# EAGLE board hodiny (EAGLE 7.6.0)
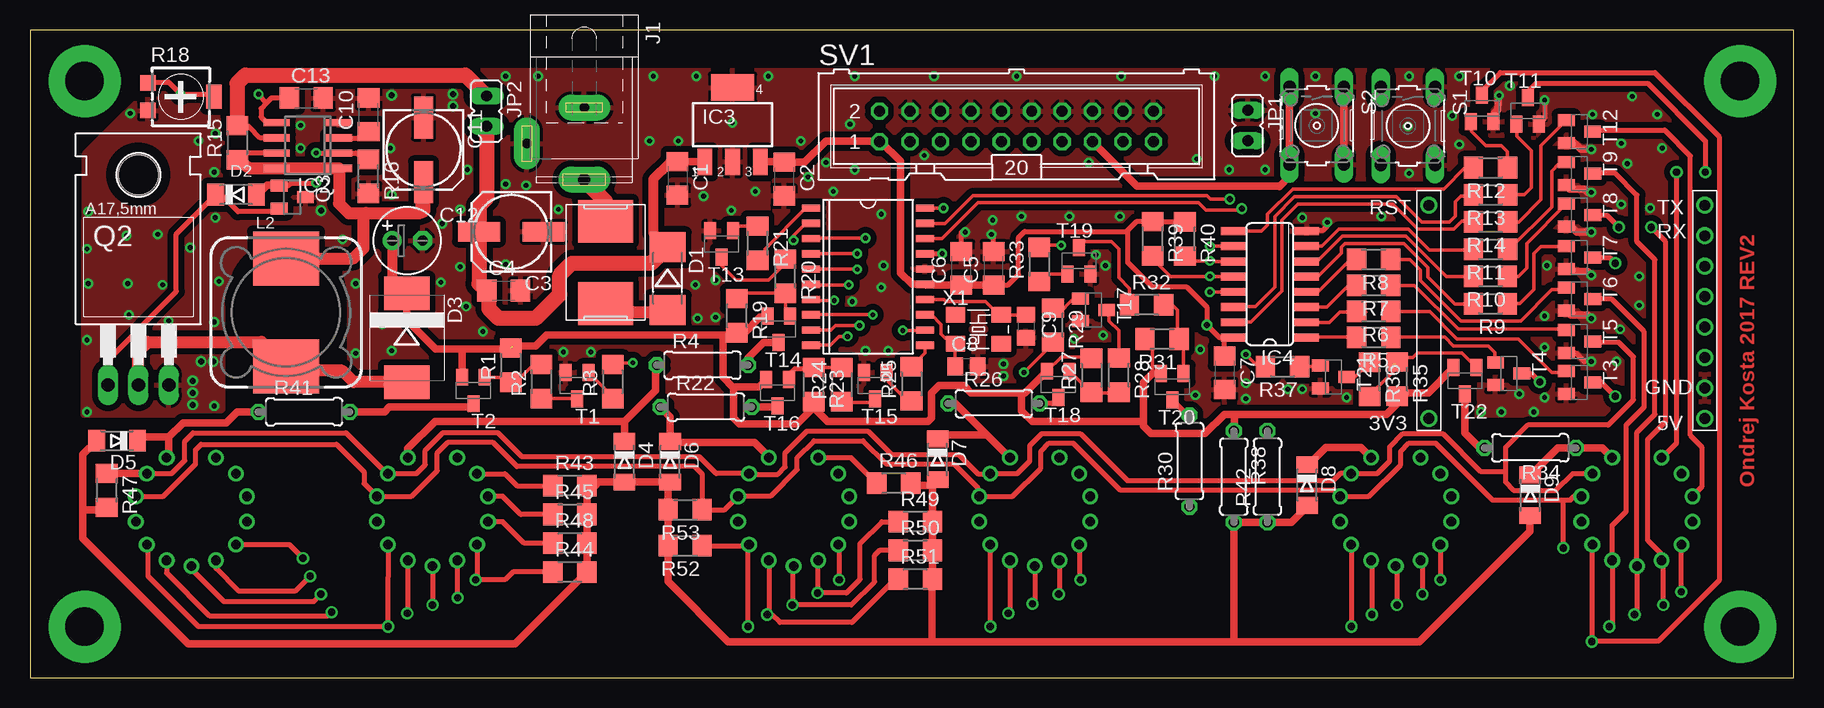
[diagram p0: board, top side]
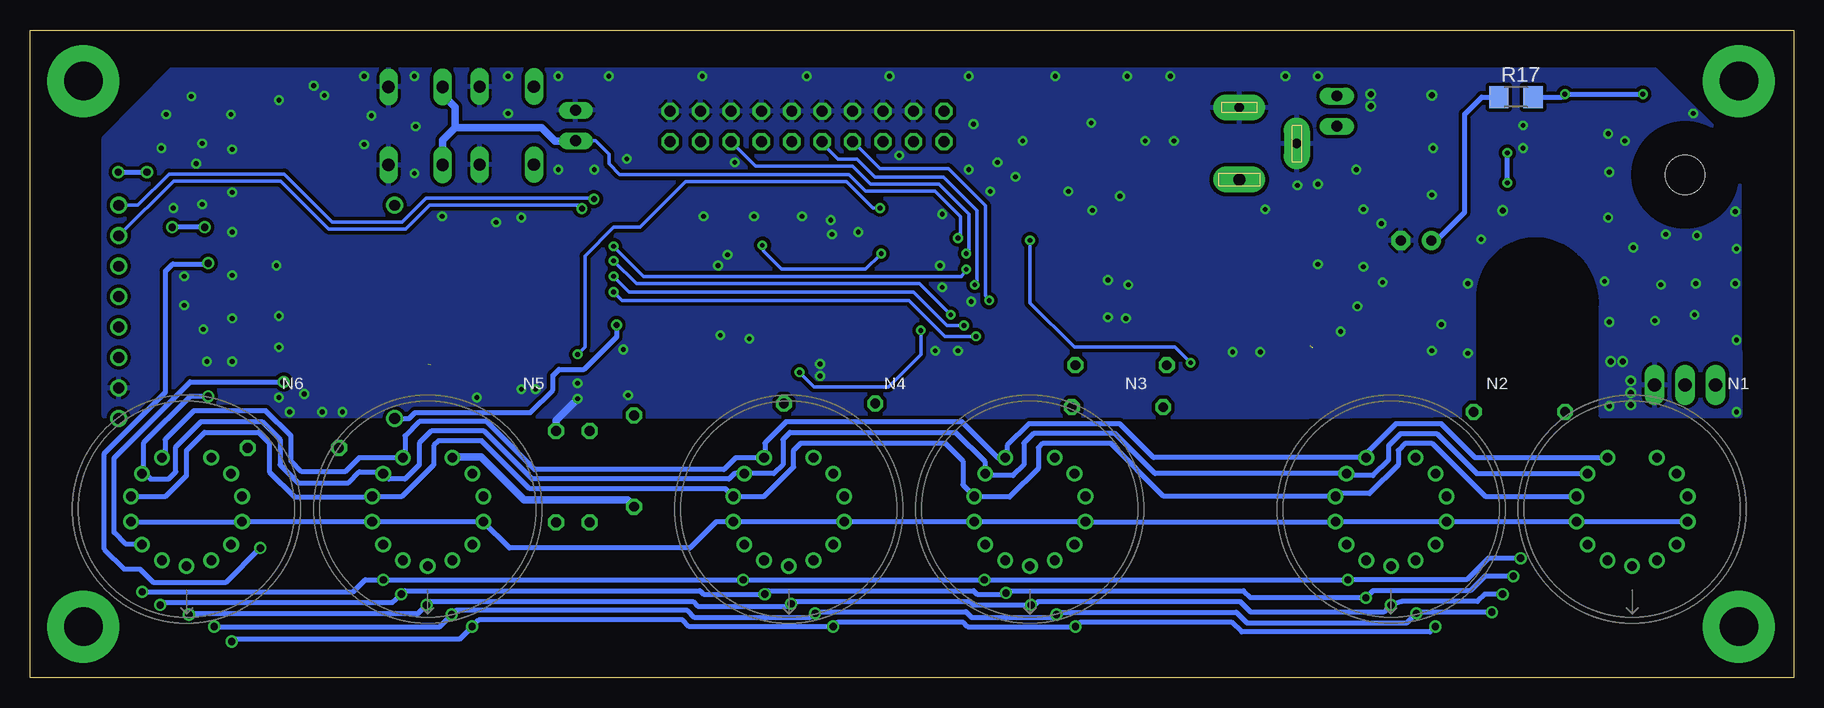
[diagram p1: board, bottom side, seen from below]

Size 147 x 54 mm. Coordinates in mm from the lower left corner, seen from the top.
Outline: 0,0 147,0 147,54 0,54 0,0
Copper layers (1*16): Top 0.035mm / dielectric 1.5mm / Bottom 0.035mm
Design rules "default *": minimum track width 0.2mm, minimum drill 0.4mm, track to track 0.25mm, track to pad 0.25mm, pad to pad 0.25mm, via to via 0.25mm, smd to smd 8mil, copper to edge 40mil, drill to drill 8mil, minimum pad ring 10mil, minimum via ring 8mil, stop-mask expansion 4mil, vias tented up to drill 0mil, thermal gap 10mil

## Footprints (pad centres in the part's own frame; a part is rotated, then mirrored left to right if it is on the bottom)
C1206 = smd 1.6 x 1.8: 1 -1.4,0; 2 1.4,0
153CLV-0605 = smd 3.5 x 1.6: + 2.7,0; - -2.7,0
C0805 = smd 1.3 x 1.5: 1 -0.95,0; 2 0.95,0
E2,5-6 = drill 0.813 pad 1.6: + -1.27,0 | drill 0.813 pad 1.6 octagon: - 1.27,0
MELF-MLL41 = smd 2.5 x 3: A 2.625,0; C -2.625,0
SOD80C = smd 1.4 x 1.8: 1 -1.7,0; 2 1.7,0
SMC = smd 2.8 x 3.8: A 3.7,0; C -3.7,0
MINIMELF = smd 1.4 x 1.8: A 1.7,0; C -1.7,0
3425L = smd 3.556 x 4.57: P$1 -3.43,0; P$2 3.438,0
SOIC8 = smd 0.6 x 2.2: 1 -1.905,-2.6; 2 -0.635,-2.6; 3 0.635,-2.6; 4 1.905,-2.6; 5 1.905,2.6; 6 0.635,2.6; 7 -0.635,2.6; 8 -1.905,2.6
SOT223 = smd 1.219 x 2.235: 1 -2.311,-3.099; 2 0,-3.099; 3 2.311,-3.099 | smd 3.6 x 2.2: 4 0,3.099
SO16 = smd 0.66 x 2.032: 1 -4.445,-3.073; 2 -3.175,-3.073; 3 -1.905,-3.073; 4 -0.635,-3.073; 5 0.635,-3.073; 6 1.905,-3.073; 7 3.175,-3.073; 8 4.445,-3.073; 9 4.445,3.073; 10 3.175,3.073; 11 1.905,3.073; 12 0.635,3.073; 13 -0.635,3.073; 14 -1.905,3.073; 15 -3.175,3.073; 16 -4.445,3.073
SPC4077 = drill 0.8 pad 2.184 long: 1 -3,0; 2 0,-4.8 | drill 1 pad 2.184 long: 3 3,0
JP1 = drill 0.914 long: 1 0,-1.27; 2 0,1.27
MSS1278 = smd 5.5 x 4.5: 1 0,4.5; 2 0,-4.5
Z570M = drill 0.8: 1 2.061,-4.28; 2 3.714,-2.962; 3 4.631,-1.057; 4 4.631,1.057; 5 3.714,2.962; 6 2.061,4.28; 7 0,4.75; 8 -2.061,4.28; 9 -3.714,2.962; 10 -4.631,1.057; 11 -4.631,-1.057; 12 -3.714,-2.962; 13 -2.061,-4.28
TO220BH = drill 1.118 long: D 0,-6.35; G -2.54,-6.35; S 2.54,-6.35 | hole 3.302: 0,11.176
SOT23 = smd 1 x 1.4: 1 -0.95,-1.1; 2 0.95,-1.1; 3 0,1.1
R1206 = smd 1.6 x 1.803: 1 -1.422,0; 2 1.422,0
0207/7 = drill 0.813 octagon: 1 -3.81,0; 2 3.81,0
RTRIM4G/J = smd 1.3 x 1.3: 1 -1.15,-2.75; 3 1.15,-2.75 | smd 2 x 1.3: 2 0,2.75
B3F-10XX = drill 1.016 long: 1 -3.251,2.261; 2 3.251,2.261; 3 -3.251,-2.261; 4 3.251,-2.261
ML20 = drill 0.914 octagon: 1 -11.43,-1.27; 2 -11.43,1.27; 3 -8.89,-1.27; 4 -8.89,1.27; 5 -6.35,-1.27; 6 -6.35,1.27; 7 -3.81,-1.27; 8 -3.81,1.27; 9 -1.27,-1.27; 10 -1.27,1.27; 11 1.27,-1.27; 12 1.27,1.27; 13 3.81,-1.27; 14 3.81,1.27; 15 6.35,-1.27; 16 6.35,1.27; 17 8.89,-1.27; 18 8.89,1.27; 19 11.43,-1.27; 20 11.43,1.27
SOT23-BEC = smd 1 x 1.4: B -0.95,-1.1; C 0,1.1; E 0.95,-1.1
SOT163-1 = smd 0.6 x 1.5: 1 -5.715,-4.75; 2 -4.445,-4.75; 3 -3.175,-4.75; 4 -1.905,-4.75; 5 -0.635,-4.75; 6 0.635,-4.75; 7 1.905,-4.75; 8 3.175,-4.75; 9 4.445,-4.75; 10 5.715,-4.75; 11 5.715,4.75; 12 4.445,4.75; 13 3.175,4.75; 14 1.905,4.75; 15 0.635,4.75; 16 -0.635,4.75; 17 -1.905,4.75; 18 -3.175,4.75; 19 -4.445,4.75; 20 -5.715,4.75
ESP8266-LIM = drill 0.9: 3V3 0,0; 5V 23,0; GND 23,2.54; P$8 23,5.08; P$9 23,7.62; P$10 23,10.16; P$11 23,12.7; RST 0,17.78; RX 23,15.24; TX 23,17.78
IQG5032B = smd 1.6 x 1.3: 1 -1.9,-1.2; 2 1.9,-1.2; 3 1.9,1.2; 4 -1.9,1.2

## Placement (x,y rotation side)
C1  330n  [C1206]  53.97,41.62 270 top
C2  100n  [C1206]  62.87,41.57 270 top
C3  100uF/25V  [153CLV-0605]  40.13,37.17 180 top
C4  100n  [C1206]  39.48,32.27 0 top
C5  100n  [C1206]  80.33,34.13 90 top
C6  10n  [C1206]  77.63,34.12 90 top
C7  100n  [C1206]  99.57,25.42 270 top
C8  39p  [C0805]  78.06,25.93 0 top
C9  39p  [C0805]  83.02,29.29 270 top
C10  2200p  [C1206]  28.23,46.93 90 top
C11  220uF/25V  [153CLV-0605]  32.8,44 270 top
C12  2.2uF/250V  [E2,5-6]  31.45,36.43 0 top
C13  10n  [C1206]  23.03,48.32 0 top
D1  1N4007  [MELF-MLL41]  53.15,33.27 270 top
D2  PMLL4148L  [SOD80C]  17.17,40.27 0 top
D3  ES3F  [SMC]  31.4,28.33 270 top
D4  BAV103  [MINIMELF]  49.55,18 270 top
D5  BAV103  [MINIMELF]  7.25,19.75 180 top
D6  BAV103  [MINIMELF]  53.35,18 270 top
D7  BAV103  [MINIMELF]  75.65,18.2 270 top
D8  BAV103  [MINIMELF]  106.45,16.05 270 top
D9  BAV103  [MINIMELF]  125.05,15.2 270 top
F1  3425L  [3425L]  47.97,34.62 270 top
IC2  MC34063AD  [SOIC8]  23.16,44.36 90 top
IC3  UA78M33DCY  [SOT223]  58.56,46.1 0 top
IC4  4028D  [SO16]  103.35,32.8 90 top
J1  12V  [SPC4077]  46.2,44.53 270 top
JP1  [JP1]  101.51,46.03 180 top
JP2  [JP1]  38.06,47.23 180 top
L2  MSS1278-220uF  [MSS1278]  21.35,30.45 0 top
N1  Z573M  [Z570M]  13.45,14.05 180 bottom
N2  Z573M  [Z570M]  33.55,14.05 180 bottom
N3  Z573M  [Z570M]  63.65,14.05 180 bottom
N4  Z573M  [Z570M]  83.75,14.05 180 bottom
N5  Z573M  [Z570M]  113.85,14.05 180 bottom
N6  Z573M  [Z570M]  133.95,14.05 180 bottom
Q2  IRF740H  [TO220BH]  9.04,30.74 0 top
Q3  MMBTA56-SOT23  [SOT23]  21.86,40.06 270 top
R1  10K  [R1206]  40.08,26.05 90 top
R2  470K  [R1206]  42.63,24.68 90 top
R3  56K  [R1206]  48.58,24.67 90 top
R4  12K  [0207/7]  56.05,26.05 0 top
R5  7K5  [R1206]  112.01,28.38 180 top
R6  7K5  [R1206]  112.01,30.53 180 top
R7  7K5  [R1206]  112,32.7 180 top
R8  7K5  [R1206]  112,34.86 180 top
R9  7K5  [R1206]  121.73,31.18 180 top
R10  7K5  [R1206]  121.73,33.45 180 top
R11  7K5  [R1206]  121.74,35.72 180 top
R12  7K5  [R1206]  121.74,42.52 180 top
R13  7K5  [R1206]  121.74,40.26 180 top
R14  7K5  [R1206]  121.74,37.99 180 top
R15  1R  [R1206]  17.28,44.59 90 top
R16  1K  [R1206]  28.22,41.79 270 top
R17  1M5  [R1206]  23.13,48.4 0 bottom
R18  20K  [RTRIM4G/J]  12.57,48.44 270 top
R19  10K  [R1206]  58.92,30.17 270 top
R20  470K  [R1206]  62.97,33.47 270 top
R21  56K  [R1206]  60.65,36.22 270 top
R22  12K  [0207/7]  56.35,22.55 0 top
R23  10K  [R1206]  65.32,24.43 270 top
R24  470K  [R1206]  67.67,24.42 90 top
R25  56K  [R1206]  73.48,24.49 90 top
R26  12K  [0207/7]  80.35,22.85 0 top
R27  10K  [R1206]  88.48,25.21 90 top
R28  470K  [R1206]  90.77,25.22 270 top
R29  56K  [R1206]  85.27,29.39 270 top
R30  12K  [0207/7]  96.65,18.05 90 top
R31  10K  [R1206]  94.37,28.23 180 top
R32  470K  [R1206]  93.08,31.07 0 top
R33  56K  [R1206]  84.13,34.45 90 top
R34  12K  [0207/7]  125.05,19.15 180 top
R35  10K  [R1206]  113.97,24.88 270 top
R36  470K  [R1206]  111.67,24.87 270 top
R37  56K  [R1206]  104.41,25.93 180 top
R38  47K  [0207/7]  100.35,16.75 270 top
R39  10K  [R1206]  93.57,36.59 270 top
R40  10K  [R1206]  96.27,36.57 270 top
R41  12K  [0207/7]  22.85,22.15 0 top
R42  47K  [0207/7]  103.15,16.75 90 top
R43  220K  [R1206]  45,16 0 top
R44  220K  [R1206]  45,8.8 0 top
R45  220K  [R1206]  45,13.6 0 top
R46  220K  [R1206]  72,16.2 0 top
R47  220K  [R1206]  6.4,15.6 270 top
R48  220K  [R1206]  45,11.2 0 top
R49  220K  [R1206]  73.8,13 0 top
R50  220K  [R1206]  73.8,10.6 0 top
R51  220K  [R1206]  73.8,8.2 0 top
R52  220K  [R1206]  54.6,11 180 top
R53  220K  [R1206]  54.6,14 180 top
S1  [B3F-10XX]  114.86,46 270 top
S2  [B3F-10XX]  107.26,46.03 270 top
SV1  [ML20]  82.23,45.97 0 top
T1  BTA42  [SOT23-BEC]  45.61,24.34 180 top
T2  BTA92  [SOT23-BEC]  36.96,23.94 180 top
T3  BTA42  [SOT23-BEC]  129.16,24.61 270 top
T4  BTA42  [SOT23-BEC]  123.26,25.34 270 top
T5  BTA42  [SOT23-BEC]  129.16,28.01 270 top
T6  BTA42  [SOT23-BEC]  129.16,31.56 270 top
T7  BTA42  [SOT23-BEC]  129.16,35.01 270 top
T8  BTA42  [SOT23-BEC]  129.16,38.56 270 top
T9  BTA42  [SOT23-BEC]  129.16,42.01 270 top
T10  BTA42  [SOT23-BEC]  121.04,47.46 0 top
T11  BTA42  [SOT23-BEC]  124.84,47.25 0 top
T12  BTA42  [SOT23-BEC]  129.15,45.51 270 top
T13  BTA42  [SOT23-BEC]  57.65,36.16 180 top
T14  BTA92  [SOT23-BEC]  62.41,29.05 180 top
T15  BTA42  [SOT23-BEC]  70.45,24.34 180 top
T16  BTA92  [SOT23-BEC]  62.31,23.75 180 top
T17  BTA42  [SOT23-BEC]  88.65,30.66 270 top
T18  BTA92  [SOT23-BEC]  85.71,24.45 180 top
T19  BTA42  [SOT23-BEC]  87.44,34.75 0 top
T20  BTA92  [SOT23-BEC]  95.21,24.25 180 top
T21  BTA42  [SOT23-BEC]  108.65,25.06 270 top
T22  BTA92  [SOT23-BEC]  119.61,24.75 180 top
U1  LPC812M101JD20  [SOT163-1]  69.87,33.43 270 top
U$1  ESP8266-LIM  [ESP8266-LIM]  116.6,21.6 0 top
X1  SMCE-5032  [IQG5032B]  79.05,29.05 0 top

## Library data of the parts
C1-C13 R1-R53 = rcl
D1 D3-D9 = diode
D2 = NXP_60_26022015; FARNELL: 1097176
F1 = ptc-littlefuse
IC2 = mc34063
IC3 = linear
IC4 = 40xx
J1 = con-jack; OC_FARNELL: unknown; OC_NEWARK: unknown
JP1 JP2 = jumper
L2 = inductor-coilcraft-3
N1-N6 = nixietubes-western
Q2 = transistor-power
Q3 = transistor-pnp
S1 S2 = switch-omron; MPN: B3F-1000; OC_FARNELL: 176432; OC_NEWARK: 36M3542
SV1 = con-harting-ml; OC_FARNELL: unknown; OC_NEWARK: unknown
T1-T22 = transistor
U1 = NXP_60_26022015; COMP: 1; FLASH: 16k; GPIO: 18; I2C: 1; SPI: 1; SRAM: 4k; USART: 2
U$1 = esp8266-lim
X1 = interquip

## Nets
100V: D4.A D5.A D6.A D7.A D8.A D9.A R38.2 R42.1 R43.2 R44.2 R45.2 R46.2 R47.2 R48.2 R49.2 R50.2 R51.2 R52.2 R53.2
180V: C12.+ D3.C R1.2 R17.1 R19.2 R23.2 R27.2 R31.2 R35.2 R38.1 T2.E T14.E T16.E T18.E T20.E T22.E
+3V3: C2.1 C5.1 C6.1 C7.1 IC3.3 IC4.16 R39.1 R40.1 SV1.1 U1.15 U$1.3V3
+12V: C1.1 C3.+ C4.1 D1.C IC3.1 JP2.2
BCD_A: IC4.10 U1.5
BCD_B: IC4.13 U1.10
BCD_C: IC4.12 R39.2 U1.9
BCD_D: IC4.11 R40.2 U1.8
GND: C1.2 C2.2 C3.- C4.2 C5.2 C6.2 C7.2 C8.2 C9.2 C10.2 C11.- C12.- C13.2 IC2.4 IC3.2 IC3.4 IC4.8 J1.1 J1.2 JP1.1 Q2.S Q3.3 R16.2 R18.3 R42.2 S1.1 S1.2 S2.1 S2.2 SV1.4 SV1.6 SV1.8 SV1.10 SV1.12 SV1.14 SV1.16 SV1.18 SV1.20 T1.E T3.E T4.E T5.E T6.E T7.E T8.E T9.E T10.E T11.E T12.E T13.E T15.E T17.E T19.E T21.E U1.16 U$1.GND
H1: R3.2 U1.2
H2: R21.2 U1.1
K0: N1.12 N2.12 N3.12 N4.12 N5.12 N6.12 R47.1 T5.C
K1: N1.1 N2.1 N3.1 N4.1 N5.1 N6.1 R46.1 T11.C
K2: N1.2 N2.2 N3.2 N4.2 N5.2 N6.2 R43.1 T3.C
K3: N1.3 N2.3 N3.3 N4.3 N5.3 N6.3 R45.1 T12.C
K4: N1.5 N2.5 N3.5 N4.5 N5.5 N6.5 R44.1 T4.C
K5: N1.6 N2.6 N3.6 N4.6 N5.6 N6.6 R49.1 T8.C
K6: N1.7 N2.7 N3.7 N4.7 N5.7 N6.7 R50.1 T9.C
K7: N1.8 N2.8 N3.8 N4.8 N5.8 N6.8 R51.1 T6.C
K8: N1.9 N2.9 N3.9 N4.9 N5.9 N6.9 R52.1 T10.C
K9: N1.11 N2.11 N3.11 N4.11 N5.11 N6.11 R53.1 T7.C
K10: N1.4 N1.10 N2.4 N2.10 N3.4 N3.10 N4.4 N4.10 N5.4 N5.10 N6.4 N6.10 R48.1
M1: R25.2 U1.11
M2: R29.2 U1.12
N$1: F1.P$1 J1.3
N$2: D1.A F1.P$2
N$3: S2.3 S2.4 SV1.15 U1.4
N$4: JP1.2 S1.3 S1.4 U1.3
N$5: SV1.9 U1.6
N$6: SV1.7 U1.7
N$7: C9.1 U1.14 X1.3
N$8: C8.1 U1.13 X1.1
N$10: U1.18 U$1.RX
N$12: R3.1 T1.B
N$13: R2.1 T1.C
N$14: R1.1 R2.2 T2.B
N$16: R21.1 T13.B
N$17: R41.2 T2.C
N$18: IC4.1 R5.2
N$19: D5.C N1.13 R41.1
N$20: IC4.2 R6.2
N$21: IC4.3 R7.2
N$22: IC4.4 R8.2
N$23: IC4.5 R9.2
N$24: IC4.6 R10.2
N$25: IC4.7 R11.2
N$26: IC4.9 R12.2
N$27: IC4.14 R13.2
N$28: IC4.15 R14.2
N$29: R5.1 T4.B
N$30: R6.1 T3.B
N$31: R7.1 T5.B
N$32: R8.1 T6.B
N$33: R10.1 T8.B
N$34: R11.1 T9.B
N$35: R12.1 T10.B
N$36: R13.1 T11.B
N$37: R14.1 T12.B
N$38: R9.1 T7.B
N$39: C11.+ IC2.1 IC2.7 IC2.8 L2.1 R15.1
N$40: C10.1 IC2.3
N$41: D2.1 Q2.G Q3.2
N$42: D3.A L2.2 Q2.D
N$43: D2.2 IC2.2 Q3.1 R16.1
N$44: R20.1 T13.C
N$45: IC2.6 JP2.1 R15.2
N$46: C13.1 IC2.5 R17.2 R18.1 R18.2
N$47: R19.1 R20.2 T14.B
N$48: R4.2 T14.C
N$49: D4.C N2.13 R4.1
N$51: R25.1 T15.B
N$52: R24.1 T15.C
N$53: R23.1 R24.2 T16.B
N$54: R22.2 T16.C
N$55: D6.C N3.13 R22.1
N$57: R29.1 T17.B
N$58: R28.1 T17.C
N$59: R27.1 R28.2 T18.B
N$60: R26.2 T18.C
N$61: D7.C N4.13 R26.1
N$63: R33.1 T19.B
N$64: R32.1 T19.C
N$65: R31.1 R32.2 T20.B
N$66: R30.2 T20.C
N$67: D8.C N5.13 R30.1
N$68: U1.19 U$1.TX
N$69: R37.1 T21.B
N$70: R36.1 T21.C
N$71: R35.1 R36.2 T22.B
N$72: R34.2 T22.C
N$73: D9.C N6.13 R34.1
S1: R33.2 U1.17
S2: R37.2 U1.20

## Tracks (layer width: path | path; a pad name or v marks a point on that pad's centre or on a via)
100V
  Top 0.61: 5.6,19.7 D5.A 4.4,18.6 4.4,14 | 53.35,10.83 R52.2 | R52.2 R53.2 53.18,16.08 D6.A D4.A 47.4,16.3 47.1,16 R43.2 | 46.67,16.25 R43.2 | R43.2 R45.2 | R45.2 46.42,13.02 46.4,13 46.4,13.58 R45.2 | R45.2 R48.2 R44.2 40.42,2.8 13.2,2.8 4.4,11.6 4.4,14 | R47.2 6.22,14 4.4,14 | D7.A 75.22,16.02 | 75.22,16.02 R49.2 R50.2 R51.2 75.2,6.38 75.2,3 | R52.2 53.18,8.02 58.2,3 75.2,3 | 75.22,16.02 73.6,16.02 R46.2 | 100.35,3 115.8,3 125,12.2 125,13.4 D9.A | 100.35,3 75.2,3 | D8.A 106.45,14.25 105.14,12.94 R42.1 R38.2 100.35,3
180V  (1 unrouted)
  Top 0.305: R31.2 93.55,27.43 93.55,25.35 | 88.26,26.65 R27.2 88.07,26.43 87.75,26.75 85.96,26.75 T18.E
  Top 0.61: 36.05,25.08 T2.E 36.01,27.21 36.2,27.4 | T20.E 93.55,25.35 92.8,24.6 92.8,21.5 | T16.E 60.76,24.25 58.65,24.25 | R23.2 65.32,22.52 | 58.65,24.25 58.65,21.65 59.15,21.15 63.95,21.15 65.32,22.52 | 84.76,25.16 T18.E 84.55,25.55 84.55,25.35 82.95,23.75 82.65,23.75 | 82.65,23.75 78.45,23.75 77.85,24.35 75.75,24.35 75.15,23.75 75.15,21.65 74.85,21.35 66.49,21.35 65.32,22.52 | 82.65,23.75 82.65,22.25 83.55,21.35 92.65,21.35 92.8,21.5 | 58.65,24.25 58.55,24.25 57.75,25.05 57.75,28.55 | T14.E 61.36,30.05 60.85,30.05 59.55,28.75 R19.2 58.35,28.75 58.15,28.55 57.75,28.55 | 57.75,28.55 43.05,28.55 42.15,27.65 40.26,27.65 | 100.4,21.95 99.55,21.95 97.95,20.35 93.45,20.35 92.8,21 92.8,21.5 | R38.1 100.4,20.61 100.4,21.95 | D3.C 31.4,29.8 33.8,27.4 36.2,27.4 | 36.2,27.4 40.01,27.4 R1.2 | 116.56,23.75 T22.E | 116.55,23.76 116.56,23.75 | 116.56,23.75 114.06,23.75 114,23.69 R35.2 113.97,22.87 113.05,21.95 100.4,21.95
  Top 0.813: C12.+ 30.18,33.25 D3.C
  Bottom 0.406: C12.+ 29.77,36.43 27.4,38.8 27.4,47 26,48.4 R17.1
+3V3  (via drill 0.5)
  Top 0.406: R40.1 96.25,38.01 R39.1 92.21,38.01 91.5,37.3 | 99.65,28.35 99.15,28.35 v98.1,29.4 98.1,30.9 96.45,32.55 93.55,32.55 91.5,34.6 91.5,37.3 | 99.65,28.35 IC4.16 | C7.1 99.57,28.27 99.65,28.35 | C5.1 81.53,32.73 82.4,33.6 82.4,36.7 82.9,37.2 91.4,37.2 91.5,37.3
  Top 0.61: IC3.3 63.14,43 C2.1 64.57,42.97 66.35,44.75 70.75,44.75 SV1.1 70.9,44.7 72.55,43.05 72.55,33.75 73.5,32.8 U1.15 74.69,32.72 C6.1 C5.1
  Bottom 0.406: v98.1,29.4 98.1,28.4 100.8,25.7 102.9,25.7 103.4,25.2 103.4,24 105.3,22.1 114.9,22.1 115.4,21.6 U$1.3V3
+12V
  Top 0.61: C1.1 56.23,43.02 IC3.1
  Top 0.813: C1.1 53.9,42.95 53.35,42.95 51.95,41.55 51.95,37.09 D1.C
  Top 1.27: JP2.2 38.06,39.96 37.45,39.35 37.45,37.19 C3.+ | 36.95,37.19 C3.+ | C3.+ 37.43,32.82 C4.1 38.25,32.1 38.25,30.75 39.05,29.95 42.15,29.95 44.15,31.95 44.15,33.55 45.15,34.55 51.8,34.55 D1.C
BCD_A  (via drill 0.4)
  Top 0.305: U1.5 68.73,34.06 v68.95,34.05 | v98.35,35.95 98.38,35.98 IC4.10
  Bottom 0.305: v68.95,34.05 69.35,33.45 95.85,33.45 v98.35,35.95
BCD_B  (via drill 0.4)
  Top 0.305: U1.10 66.72,27.71 67.45,28.45 v68.15,28.45 | v98.35,32.15 98.36,32.16 IC4.13
  Bottom 0.305: v98.35,32.15 97.65,31.45 73.75,31.45 70.75,28.45 v68.15,28.45
BCD_C  (via drill 0.4)
  Top 0.305: U1.9 66.78,28.98 67.15,29.35 v69.15,29.35 | R39.2 93.57,34.93 95.05,33.45 v98.35,33.45 98.36,33.44 IC4.12
  Bottom 0.305: v98.35,33.45 97.05,32.15 73.35,32.15 70.55,29.35 v69.15,29.35
BCD_D  (via drill 0.4)
  Top 0.305: U1.8 v70.25,30.25 | R40.2 96.67,34.75 v98.35,34.75 98.39,34.7 IC4.11
  Bottom 0.305: v70.25,30.25 72.85,32.85 96.45,32.85 v98.35,34.75
GND  (via drill 0.4, 0.5)
  Top 0.406: C6.2 77.63,37.13 v77.95,37.15 | C5.2 80.33,37.07 v80.15,36.95 | v126.25,48.15 126.25,46.61 T11.E | v130.15,26.35 129.55,26.35 128.85,27.05 T5.E | IC4.8 106.48,37.3 107.8,37.3 108.15,37.65 v108.15,37.95
  Top 0.61: S2.1 S2.2 | v130.15,33.55 129.85,33.85 128.27,33.85 T7.E | v130.15,29.95 129.85,30.25 128.42,30.25 T6.E | v130.15,37.15 128.95,37.15 128.65,37.45 128.22,37.45 T8.E | v130.15,40.45 129.85,40.45 129.55,40.75 128.37,40.75 T9.E | v130.15,44.05 129.25,44.05 128.65,44.65 128.14,44.65 T12.E | v122.45,48.55 122.35,47.35 122.05,47.05 122.05,46.42 T10.E
  Bottom 0.61: R42.2 103.15,21.45 v101.35,23.25
  other vias: 35.25,47.65 30.15,48.55 15.25,26.35 13.55,23.75 44.45,27.15 46.75,27.15 87.05,28.25 106.05,24.05 101.35,24.55 88.85,35.25 89.65,34.35 106.05,38.35 126.25,27.55 124.15,23.65 90.85,38.45 86.65,38.45 80.25,38.15 82.65,38.45 120.95,22.15 130.25,46.95 109.75,23.35 89.45,28.55 81.15,25.15 81.15,26.15 71.55,27.25 123.35,49.35 119.15,44.45 114.95,42.05 119.15,50.15 114.95,50.15 107.15,50.15 118.55,46.85 102.95,42.35 99.95,42.35 102.95,50.15 98.75,50.15 90.95,50.15 74.55,43.55 82.25,50.15 68.75,50.15 68.75,42.35 66.95,40.55 66.35,42.95 64.85,41.75 64.25,44.75 61.55,50.15 55.55,50.15 69.65,27.25 97.25,43.25 54.05,44.75 51.95,50.15 58.45,38.95 56.15,40.15 57.15,30.05 51.65,44.75 57.15,33.15 71.15,34.35 70.95,38.65 42.35,50.15 39.65,50.15 41.35,41.05 39.65,41.15 35.25,48.65 36.35,30.95 34.25,32.95 35.85,34.25 35.85,39.05 36.45,42.35 34.35,37.85 30.15,40.25 15.45,38.35 15.35,42.15 14.05,44.75 11.05,32.75 8.25,30.25 10.65,36.95 4.85,38.85 4.75,35.75 8.35,47.05 8.15,32.85 8.05,36.85 4.85,32.85 15.75,33.05 11.55,29.75 15.35,29.65 70.95,32.55 44.05,39.05 13.55,24.75 4.75,22.15 55.65,29.95 15.35,22.65 68.35,46.15 24.25,38.95 125.35,22.15 122.65,22.15 58.55,46.25 15.45,45.35 60.45,40.55 88.25,42.95 75.35,50.15 22.55,46.05 22.55,44.15 55.45,32.75 114.85,45.95 37.75,28.85 68.55,31.35 97.15,23.55 107.15,47.05 126.45,34.35 126.25,30.15 39.65,34.45 30.05,44.15 132.55,29.05 132.25,26.35 132.65,39.45 132.65,44.55 135.65,46.95 133.55,48.45 135.05,39.15 136.05,44.15 133.15,42.85 134.15,31.05 134.15,33.45 126.25,23.35 4.75,28.15 13.55,22.75 14.25,26.35 13.35,35.85 27.15,32.85 27.15,27.05 30.15,27.25 29.35,29.45 26.05,36.55 104.85,24.05 97.55,27.35 112.65,38.45
  pour Bottom (isolate 0.305): 4.45,21.85 4.53,43.67 11.53,50.65 135.25,50.65 140.85,44.95 140.85,21.85 43.85,21.75 26.65,21.95 26.65,31.95 arc90 21.25,36.95 arc90 16.05,30.75 16.05,21.85
  pour Top (isolate 0.5): 4.45,21.85 4.53,43.67 11.53,50.65 135.25,50.65 140.85,44.95 140.85,21.85 43.85,21.75 26.65,21.95 26.65,31.95 arc90 21.25,36.95 arc90 16.05,30.75 16.05,21.85
H1  (via drill 0.4)
  Top 0.305: U1.2 65.09,37.85 64.65,37.85 63.65,36.85 v63.65,36.45 | R3.2 48.74,26.25 v50.25,26.25
  Bottom 0.305: v63.65,36.45 63.65,31.25 59.95,27.55 51.55,27.55 v50.25,26.25
H2
  Top 0.305: 65.14,39.15 U1.1 64.64,39.15 61.25,35.75 61.25,35.4 R21.2
K0
  Top 0.406: N1.12 11.81,17.01 12.9,18.1 12.9,19.7 13.6,20.4 26.35,20.4 29.74,17.01 N2.12 32.21,17.01 32.95,17.75 32.95,18.95 34.4,20.4 39,20.4 41,18.4 55.8,18.4 57.19,17.01 N3.12 60,16.95 62.35,16.95 62.95,17.55 62.95,18.75 64.75,20.55 69.85,20.55 71.8,18.6 77.4,18.6 79,17 80.02,17 N4.12 82.31,17.01 83.35,18.05 83.35,19.35 84.35,20.35 87.55,20.35 91.5,16.4 108.6,16.4 109.21,17.01 N5.12 112.31,17.01 113.35,18.05 113.35,19.25 114.45,20.35 117.75,20.35 120.9,17.2 123,17.2 | T5.C 130.32,27.95 132.45,27.95 133.65,26.75 133.65,23.15 131.55,21.05 124.85,21.05 123,19.2 123,17.2 | N6.12 130.22,17 128.6,17 127.2,15.6 123.7,15.6 123,16.3 123,17.2
  Top 0.61: R47.1 N1.12
K1  (via drill 0.6)
  Top 0.406: T11.C 124.84,48.84 125.55,49.55 134.85,49.55 139.65,44.75 v139.65,42.15 | N6.1 137.25,19.57 v137.25,42.15 | R46.1 68.45,18.33 N3.1
  Bottom 0.406: N1.1 26.53,18.33 29.35,21.15 33.15,21.15 35.61,18.69 N2.1 35.63,18.35 53.35,18.35 56.15,21.15 63.75,21.15 65.55,19.35 65.55,18.49 N3.1 66.33,18.33 69.35,21.35 83.95,21.35 85.75,19.55 85.75,18.39 N4.1 88.17,18.33 89.15,17.35 104.95,17.35 108.95,21.35 114.55,21.35 115.75,20.15 115.75,18.49 N5.1 119.57,18.33 120.75,17.15 124.35,17.15 125.25,18.05 125.25,20.15 127.35,22.25 133.35,22.25 135.75,19.85 135.75,18.59 N6.1 136.01,18.39 | v139.65,42.15 v137.25,42.15
K2  (via drill 0.6)
  Top 0.406: T3.C 130.3,24.65 130.95,24.65 v132.15,23.45 | N2.2 37.28,17 39.6,17 40.6,16 R43.1
  Bottom 0.406: N1.2 26.41,17.01 29.75,20.35 32.75,20.35 33.75,19.35 33.75,18.15 35.05,16.85 37.1,16.85 N2.2 53.21,17.01 56.55,20.35 63.35,20.35 64.15,19.55 64.15,17.75 65.05,16.85 67.2,16.85 N3.2 67.36,17.96 69.85,20.45 83.65,20.45 84.25,19.85 84.25,17.75 84.99,17.01 N4.2 88.29,17.01 88.75,16.55 105.15,16.55 109.15,20.55 113.55,20.55 114.55,19.55 114.55,17.75 115.75,16.55 117.1,16.55 N5.2 117.7,17.15 119.55,17.15 120.45,16.25 124.65,16.25 126.15,17.75 126.15,19.85 127.65,21.35 132.75,21.35 134.85,19.25 134.85,17.15 135.45,16.55 136.95,16.55 137.41,17.01 N6.2 137.55,17.13 137.55,19.55 133.65,23.45 v132.15,23.45
K3
  Top 0.406: T12.C 130.39,45.65 136.25,45.65 138.4,43.5 138.4,20.2 139.35,19.25 139.35,15.88 N6.3 | R45.1 40.91,13.6 39.4,15.11 N2.3
  Bottom 0.406: N1.3 25.71,15.11 30.15,19.55 32.35,19.55 32.95,18.95 32.95,17.75 35.35,15.35 37.94,15.35 N2.3 52.51,15.11 56.95,19.55 62.55,19.55 62.95,19.15 62.95,17.45 65.35,15.05 68.22,15.05 N3.3 69.25,16.08 69.25,18.05 70.75,19.55 82.75,19.55 83.35,18.95 83.35,17.55 85.79,15.11 N4.3 89.02,15.75 105.35,15.75 109.35,19.75 112.95,19.75 113.35,19.35 113.35,17.75 115.99,15.11 N5.3 118.54,15.05 124.95,15.05 127.05,17.15 127.05,19.55 127.95,20.45 132.45,20.45 133.95,18.95 133.95,16.85 135.69,15.11 N6.3
K4  (via drill 0.6)
  Top 0.406: N1.5 21.61,11.09 v22.75,9.95 | N2.5 37.26,8.43 v37.15,8.15 39.6,8.15 40.25,8.8 R44.1 | N3.5 67.45,11 v67.45,8.15 | N4.5 87.46,8.24 v87.55,8.15 | N5.5 117.55,11.07 v117.55,8.15 | v137.65,7.15 137.65,11.07 N6.5 | T4.C 125.16,25.34 v125.85,24.65
  Bottom 0.406: v22.75,9.95 25.45,9.95 27.25,8.15 v37.15,8.15 v67.45,8.15 v87.55,8.15 v117.55,8.15 119.05,8.15 120.05,7.15 v137.65,7.15 | N6.5 137.73,11.15 139.05,11.15 140,12.1 140,18.3 133.65,24.65 v125.85,24.65
K5  (via drill 0.6)
  Top 0.406: N1.6 15.51,9.09 17.35,7.25 22.15,7.25 v23.35,8.45 | N2.6 35.61,6.69 v35.65,6.65 | N3.6 65.65,9.71 v65.65,7.05 68.05,7.05 69.2,8.2 69.2,11.2 71,13 R49.1 | N4.6 85.81,7.01 v85.75,6.95 | N5.6 116.05,9.63 v116.05,6.95 | 136.05,6.05 v136.15,6.05 136.15,9.63 N6.6 136.01,10.29 134.85,11.45 134.85,19.85 136.35,21.35 136.35,36.35 v135.15,37.55 | T8.C 131.44,38.56 v132.45,37.55
  Bottom 0.406: v23.35,8.45 25.75,8.45 26.95,7.25 35.05,7.25 v35.65,6.65 45.25,6.65 45.85,7.25 65.35,7.25 v65.65,7.05 65.75,6.95 68.05,6.95 68.35,7.25 85.45,7.25 v85.75,6.95 90.85,6.95 91.15,7.25 115.75,7.25 v116.05,6.95 116.85,6.25 135.95,6.25 v136.15,6.05 | v132.45,37.55 v135.15,37.55
K6  (via drill 0.6)
  Top 0.406: N1.7 13.45,9.05 16.15,6.35 23.65,6.35 v24.25,6.95 | N2.7 v33.55,6.05 | N3.7 63.55,9.2 v63.55,6.05 68.45,6.05 70.4,8 70.4,10.2 70.8,10.6 R50.1 | N5.7 113.95,9.2 v113.95,6.05 | v133.75,5.25 133.95,5.45 N6.7 133.95,20.45 135.45,21.95 135.45,34.85 133.95,36.35 133.95,40.25 132.15,42.05 130.3,42.05 T9.C | N4.7 83.75,6.35 v83.55,6.15
  Bottom 0.406: v24.25,6.95 25.75,6.95 26.35,6.35 32.65,6.35 v33.55,6.05 34.15,5.45 45.25,5.45 46.15,6.35 62.95,6.35 63.25,6.05 v63.55,6.05 68.35,6.05 68.65,6.35 83.35,6.35 v83.55,6.15 83.75,5.95 91.35,5.95 91.75,6.35 113.65,6.35 v113.95,6.05 114.65,5.35 133.35,5.35 133.55,5.05 v133.75,5.25
K7  (via drill 0.6)
  Top 0.406: N1.8 11.39,8.71 14.95,5.15 24.85,5.15 v25.15,5.45 | N2.8 31.49,5.39 v31.45,5.35 | 61.45,9.63 N3.8 61.59,5.29 v61.45,5.25 61.85,5.25 62.5,4.6 68.5,4.6 72.1,8.2 R51.1 | N4.8 81.69,5.59 v81.55,5.35 | N5.8 111.85,9.71 v111.85,5.25 | v131.65,4.25 131.89,4.49 N6.8 131.89,12.69 133.05,13.85 133.05,21.05 134.55,22.55 134.55,28.85 131.85,31.55 T6.C
  Bottom 0.406: v25.15,5.45 31.35,5.45 v31.45,5.35 32.25,4.55 45.55,4.55 46.45,5.45 61.15,5.45 v61.45,5.25 61.7,5 68.5,5 69,5.5 81.4,5.5 v81.55,5.35 81.65,5.35 82,5 91.6,5 92.2,5.6 111.5,5.6 v111.85,5.25 | 112.05,5.25 v111.85,5.25 | v131.65,4.25 112.85,4.25 v111.85,5.25
K8  (via drill 0.6)
  Top 0.406: N2.9 29.84,8.34 29.85,8.32 v29.85,4.25 14.05,4.25 9.85,8.45 9.85,10.97 N1.9 | 121.04,49.04 T10.C 121.04,48.94 122.55,50.45 135.45,50.45 140.8,45.1 140.8,8.1 135.75,3.05 130.25,3.05 v130.2,3 130.24,3.04 N6.9 | v59.85,4.25 59.85,11 N3.9 59.85,11 R52.1 | N4.9 80.04,4.26 v80.05,4.25 | N5.9 110.15,11.07 v110.15,4.25
  Bottom 0.406: v29.85,4.25 30.3,3.8 46,3.8 46.8,4.6 59.5,4.6 v59.85,4.25 68.85,4.25 69.2,4.6 79.7,4.6 v80.05,4.25 92.05,4.25 92.6,4.8 109.6,4.8 v110.15,4.25 111.2,3.2 130,3.2 v130.2,3
K9  (via drill 0.6)
  Top 0.406: N1.11 11.11,15.11 13.8,17.8 13.8,19 14.25,19.45 25.55,19.45 27.85,17.15 27.85,16.18 N2.11 31.81,15.11 33.95,17.25 33.95,18.75 34.8,19.6 38.6,19.6 40.6,17.6 55.4,17.6 56.02,16.98 R53.1 57.91,14 N3.11 59.06,15.15 61.75,15.15 63.95,17.35 63.95,18.35 65.35,19.75 69.45,19.75 71.4,17.8 77,17.8 79,15.8 79,15.23 N4.11 81.91,15.11 84.25,17.45 84.25,18.85 84.95,19.55 86.95,19.55 90.85,15.65 108.68,15.65 N5.11 111.61,15.11 114.25,17.75 114.25,18.85 114.95,19.55 117.15,19.55 121.9,14.8 127.8,14.8 | T7.C 131.69,35.01 v132.15,34.55 | v127.8,10.8 127.8,14.8 | 127.8,14.8 128.4,14.8 128.71,15.11 N6.11
  Bottom 0.406: v127.8,10.8 130.65,7.95 136.75,7.95 137.85,9.05 139.15,9.05 140.8,10.7 140.8,18.7 135.7,23.8 135.7,33.9 135.1,34.5 132.2,34.5 v132.15,34.55
K10
  Top 0.406: R48.1 41.2,11.2 39.4,13 N2.4
  Bottom 0.406: N1.10 N1.4 N2.10 N2.4 N3.10 N3.4 N4.10 N4.4 89.81,12.99 92,10.8 107.03,10.8 N5.10 N5.4 N6.10 N6.4
M1
  Top 0.305: U1.11 74.62,27.05 R25.2
M2  (via drill 0.4)
  Top 0.305: U1.12 74.58,28.95 v72.75,28.95 | v82.85,25.45 85.27,27.87 R29.2
  Bottom 0.305: v72.75,28.95 72.75,26.95 75.45,24.25 81.65,24.25 v82.85,25.45
N$1
  Top 1.27: J1.3 46.2,41.5 47.95,39.75 47.95,38.84 F1.P$1
N$2
  Top 1.016: 52.92,30.42 47.97,30.42 F1.P$2
  Top 1.27: 47.44,30.35 F1.P$2 | 52.92,30.42 D1.A
N$3  (via drill 0.4)
  Top 0.305: U1.4 65.14,35.35 v68.95,35.35
  Top 0.61: S2.3 S2.4 105,41.8 104.15,40.95 104.1,41 92.28,41 SV1.15
  Bottom 0.305: SV1.15 86.53,42.65 78.45,42.65 76.95,41.15 71.25,41.15 68.75,38.65 68.75,35.55 v68.95,35.35
N$4  (via drill 0.4)
  Top 0.305: v69.65,36.65 65.17,36.65 U1.3
  Bottom 0.305: JP1.2 99.86,44.76 98.75,43.65 98.75,42.85 97.85,41.95 78.75,41.95 77.35,40.55 71.55,40.55 69.45,38.45 69.45,36.85 v69.65,36.65
  Bottom 0.61: S1.4 112.6,44.8 111.55,45.85 | 111.55,45.85 104.35,45.85 103.25,44.75 JP1.2 | 111.55,45.85 111.55,47.55 112.6,48.6 S1.3
N$5  (via drill 0.4)
  Top 0.305: v68.25,32.75 65.17,32.75 U1.6
  Bottom 0.305: SV1.9 80.96,44.56 79.65,43.25 78.05,43.25 76.55,41.75 70.85,41.75 68.05,38.95 68.05,32.95 v68.25,32.75
N$6  (via drill 0.4)
  Top 0.305: v67.05,31.45 65.19,31.45 U1.7
  Bottom 0.305: v67.05,31.45 67.35,31.85 67.35,39.35 70.45,42.45 76.15,42.45 78.4,44.7 SV1.7
N$7
  Top 0.305: U1.14 76.17,31.52 76.35,31.35 79.65,31.35 80.75,30.25 X1.3 80.76,30.24 C9.1
N$8
  Top 0.305: U1.13 75.14,30.25 75.95,29.45 75.95,28.65 76.75,27.85 X1.1 77.11,27.81 C8.1
N$10  (via drill 0.5)
  Top 0.305: U1.18 76,36.6 79,39.6 97.4,39.6 98,39 100.9,39 v101,39.1
  Bottom 0.305: U$1.RX 135.04,41.4 126.1,41.4 122.1,37.4 115.7,37.4 113.7,39.4 101.3,39.4 v101,39.1
N$11  (via drill 3.2 pad 6)
  other vias: 4.55,49.75
N$12
  Top 0.305: T1.B 48.58,23.42 R3.1
N$13
  Top 0.305: T1.C 45.93,23.26 R2.1
N$14
  Top 0.305: T2.B 39.67,25.04 R1.1 40.53,24.63 41.95,26.05 42.58,26.05 R2.2
N$15  (via drill 3.2 pad 6)
  other vias: 142.55,49.75
N$16
  Top 0.305: R21.1 58.98,37.64 T13.B
N$17
  Top 0.61: T2.C 36.96,22.76 36.75,22.55 29.95,22.55 29.55,22.15 R41.2
N$18
  Top 0.305: IC4.1 106.45,28.38 R5.2
N$19
  Top 0.61: 11.55,20.05 12.75,21.25 16.35,21.25 17.25,22.15 R41.1 | 11.55,20.05 11.55,18.49 N1.13 | D5.C 9.25,20.05 11.55,20.05
N$20
  Top 0.305: 111.36,30.5 R6.2 110.56,30.5 109.2,30.5 108.33,29.62 IC4.2
N$21
  Top 0.305: IC4.3 108.09,30.89 109.9,32.7 R7.2
N$22
  Top 0.305: R8.2 110.42,34.7 109.9,34.7 107.3,32.1 106.49,32.1 IC4.4
N$23
  Top 0.305: R9.2 120.28,31.15 118.75,31.15 116.5,33.4 116.5,34.2 114.5,36.2 109.6,36.2 109.3,35.9 109.3,35.4 107.4,33.5 106.49,33.5 IC4.5
N$24
  Top 0.305: IC4.6 107.1,34.7 107.1,34.6 107.2,34.6 109.4,36.8 114.7,36.8 118.05,33.45 R10.2
N$25
  Top 0.305: R11.2 120.25,35.65 116.65,35.65 114.9,37.4 109.1,37.4 107.67,35.98 IC4.7
N$26
  Top 0.305: R12.2 120.29,42.55 119.65,42.55 117.85,40.75 105.25,40.75 103.15,38.65 103.15,37.75 102.64,37.24 IC4.9
N$27
  Top 0.305: R13.2 120.21,40.15 119.25,40.15 118.8,39.7 118.8,38.5 118.3,38 116,38 113.9,40.1 105.4,40.1 103.75,38.45 103.75,32.55 102.15,30.95 100.33,30.95 IC4.14
N$28
  Top 0.305: R14.2 120.26,38.05 119.35,38.05 118.7,37.4 115.7,37.4 113.6,39.5 105.7,39.5 104.35,38.15 104.35,32.25 101.75,29.65 100.3,29.65 IC4.15
N$29
  Top 0.305: T4.B 122.1,26.35 122.1,27.1 121.55,27.65 118.65,27.65 117.92,28.38 R5.1
N$30
  Top 0.305: T3.B 127.95,25.45 126.85,25.45 124.05,28.25 118.95,28.25 116.67,30.53 R6.1
N$31
  Top 0.305: T5.B 127.97,29.05 119.05,29.05 115.4,32.7 R7.1
N$32
  Top 0.305: T6.B 127.9,32.35 126.85,32.35 124.25,29.75 119.25,29.75 115.9,33.1 115.9,34 115.04,34.86 R8.1
N$33
  Top 0.305: R10.1 124.05,33.45 124.75,34.15 124.75,36.2 T8.B
N$34
  Top 0.305: R11.1 123.32,35.72 126.85,39.25 126.85,42.25 127.45,42.85 127.95,42.85 T9.B
N$35
  Top 0.305: R12.1 123.16,43.84 122.65,44.35 121.35,44.35 120.15,45.55 120.15,46.3 T10.B
N$36
  Top 0.305: R13.1 124.56,40.26 125.15,40.85 125.15,43.95 123.95,45.15 123.95,46.09 T11.B
N$37
  Top 0.305: R14.1 124.09,37.99 125.95,39.85 125.95,44.36 T12.B
N$38
  Top 0.305: R9.1 124.18,31.18 125.35,32.35 125.35,35.35 125.95,35.95 T7.B
N$39
  Top 0.406: IC2.7 18.14,43.73 R15.1
  Top 1.016: 26.55,38.75 25.76,39.54 IC2.1 IC2.8 18.29,42.45 R15.1 | 26.55,38.75 28,38.75 | 28,38.75 32.55,38.75 32.75,38.95 | L2.1 26.95,34.95 27.8,35.8 27.8,38.55 28,38.75 | 26.6,38.7 26.55,38.75
  Top 1.27: 32.75,38.95 32.75,41.25 C11.+
N$40
  Top 0.406: C10.1 27.53,45.23 27.25,44.95 25.8,44.95 IC2.3
N$41
  Top 0.406: 20.81,39.11 Q3.2 20.51,39.11 20.25,38.85 17.35,38.85 15.93,40.27 D2.1 | 15.85,40.25 D2.1 | Q2.G 6.5,26.5 12.2,32.2 12.2,37 D2.1
N$42
  Top 1.016: D3.A 26.97,24.63 26,25.6 21.7,25.6 L2.2 19.3,28 9.8,28 9.04,27.24 Q2.D
N$43  (via drill 0.4)
  Top 0.406: R16.1 27.18,43.75 25.79,43.75 IC2.2 25.73,43.75 v23.85,43.75 | Q3.1 21.51,41.01 21.75,41.25 v23.85,41.25
  Top 0.61: D2.2 18.97,40.27 19.75,41.05 20.72,41.05 Q3.1
  Bottom 0.406: v23.85,41.25 v23.85,43.75
N$44
  Top 0.305: T13.C 57.65,34.35 58.85,33.15 61.55,33.15 62.55,34.15 62.55,34.47 R20.1
N$45
  Top 0.406: R15.2 17.64,45.95 18.25,45.95 19.2,44.99 IC2.6 20.61,45.05
  Top 1.016: 17.55,46.04 R15.2 17.25,46.04
  Top 1.27: 17.25,46.04 17.25,49.55 17.95,50.25 36.31,50.25 JP2.1
N$46  (via drill 0.4)
  Top 0.406: C13.1 20.12,48.32 19.7,47.9 | 19.7,47.9 19.25,47.45 19.25,46.75 19.65,46.35 20.48,46.35 IC2.5 | v19.05,48.65 19.05,48.55 19.7,47.9 | R18.1 9.88,49.65 11.55,49.65 v12.55,48.65 15.11,48.65 R18.2
  Bottom 0.406: v12.55,48.65 v19.05,48.65 19.3,48.4 R17.2
N$47
  Top 0.305: T14.B 62.97,30.54 R20.2 59.38,32.05 R19.1
N$48
  Top 0.61: T14.C 61.15,27.95 59.85,26.65 R4.2
N$49
  Top 0.61: R4.1 52.15,25.96 52.15,23.95 49.55,21.35 | 49.55,21.35 33.75,21.35 31.49,19.09 N2.13 | D4.C 49.55,21.35
N$50  (via drill 3.2 pad 6)
  other vias: 142.55,4.25
N$51
  Top 0.305: R25.1 73.13,23.07 71.55,24.65 71.55,25.29 T15.B
N$52
  Top 0.305: T15.C 70.15,22.95 67.72,22.95 R24.1
N$53
  Top 0.305: R24.2 R23.1
  Top 0.406: R23.1 65.22,25.75 63.75,25.75 63.26,25.26 T16.B
N$54
  Top 0.61: T16.C 62.21,22.55 R22.2
N$55
  Top 0.61: N3.13 61.59,18.41 60.4,19.6 53.4,19.6 D6.C 53.35,21.74 R22.1
N$56  (via drill 3.2 pad 6)
  other vias: 4.55,4.25
N$57
  Top 0.305: R29.1 85.71,30.31 86.95,31.55 87.49,31.55 T17.B
N$58
  Top 0.305: T17.C 89.95,30.46 89.95,29.75 90.77,28.93 R28.1
N$59
  Top 0.305: T18.B 88.48,23.73 | 88.48,23.73 R27.1 | 88.48,23.73 90.7,23.73 R28.2
N$60
  Top 0.406: T18.C 85.21,22.85 R26.2
N$61
  Top 0.61: R26.1 77.15,22.85 79.78,20.23 | 79.78,20.23 81.67,18.33 N4.13 | D7.C 75.97,20.23 79.78,20.23
N$63
  Top 0.305: R33.1 84.95,33.65 T19.B
N$64
  Top 0.305: T19.C 87.94,36.35 90.15,36.35 90.75,35.75 90.75,33.35 91.66,32.44 R32.1
N$65
  Top 0.305: T20.B 96.16,27.66 R31.1 95.65,28.29 95.65,30.65 95.23,31.07 R32.2
N$66
  Top 0.406: R30.2 96.5,21.86 T20.C
N$67
  Top 0.61: 96.75,14.14 R30.1 | N5.13 110.92,19.2 108,19.2 106.55,17.75 D8.C
  Bottom 0.61: R30.1 97.2,14.8 105.8,14.8 109.4,18.4 111.72,18.4 N5.13
N$68  (via drill 0.5)
  Top 0.305: U1.19 76.28,37.88 78.6,40.2 98.1,40.2 98.4,39.9 v100,39.9
  Bottom 0.305: U$1.TX 138.02,39.38 135.4,42 125.8,42 121.8,38 116,38 114,40 100.1,40 v100,39.9
N$69
  Top 0.305: R37.1 108.07,25.93 T21.B
N$70
  Top 0.305: T21.C 110.44,25.06 R36.1
N$71  (1 unrouted)
  Top 0.305: T22.B 119.36,27.05 115.65,27.05 115.27,26.67 114.34,26.67 R35.1 | 113.6,26.1 113.6,26.13 | 114.14,26.67 R35.1 | R36.2 111.67,23.57 113.8,25.7 113.8,26.13 R35.1
N$72
  Top 0.61: R34.2 120.85,19.15 119.6,20.4 T22.C
N$73
  Top 0.61: N6.13 131.07,19.15 R34.1 127.35,19.15 125.1,16.9 D9.C
S1  (via drill 0.4)
  Top 0.305: v85.95,36.05 84.31,36.05 R33.2
  Top 0.406: U1.17 74.64,35.35 v76.05,35.35
  Bottom 0.305: v76.05,35.35 76.05,35.25 76.15,35.25 77.35,34.05 84.35,34.05 85.85,35.55 85.85,35.95 v85.95,36.05
S2  (via drill 0.4)
  Top 0.305: U1.20 v76.14,39.15 v76.15,39.15 | R37.2 102.97,25.95 102.35,25.95 v101.35,26.95
  Bottom 0.305: v76.15,39.15 76.75,39.15 78.95,41.35 92.35,41.35 96.15,37.55 98.35,37.55 100.75,35.15 100.75,27.55 v101.35,26.95

## Text on the board
Top: Ondrej Kosta 2017 REV2